# EAGLE board exp1.1 (EAGLE 9.6.2)

Size 42.85 x 30.47 mm. Coordinates in mm from the lower left corner, seen from the top.
Outline: 0,0 42.85,0 42.85,30.47 0,30.47 0,0
Copper layers (1*16): Top 0.035mm / dielectric 1.5mm / Bottom 0.035mm
Design rules "default": minimum track width 6mil, minimum drill 0.35mm, track to track 6mil, track to pad 6mil, pad to pad 6mil, via to via 6mil, smd to smd 6mil, copper to edge 40mil, drill to drill 6mil, minimum pad ring 10mil, minimum via ring 8mil, stop-mask expansion 4mil, vias tented up to drill 0mil, thermal gap 10mil

## Footprints (pad centres in the part's own frame; a part is rotated, then mirrored left to right if it is on the bottom)
C2.5-3 = drill 0.813 pad 1.6 octagon: 1 -1.27,0; 2 1.27,0
DIO_BPW41N = drill 0.83 pad 1.25: A 1.25,0 | drill 0.83 pad 1.25 square: C -1.25,0
DIL08 = drill 0.813 pad 1.27: 1 -3.81,-3.81; 2 -1.27,-3.81; 3 1.27,-3.81; 4 3.81,-3.81; 5 3.81,3.81; 6 1.27,3.81; 7 -1.27,3.81; 8 -3.81,3.81
0207/10 = drill 0.813 octagon: 1 -5.08,0; 2 5.08,0
22-23-2031 = drill 1 long: 1 -2.54,0; 2 0,0; 3 2.54,0

## Placement (x,y rotation side)
C1  [C2.5-3]  29.21,8.89 270 top
D1  BPW41N  [DIO_BPW41N]  5.08,20.32 0 top
IC1  LM311N  [DIL08]  21.59,13.97 0 top
R1  [0207/10]  11.43,21.59 270 top
R2  [0207/10]  11.43,7.62 270 top
R3  [0207/10]  6.35,7.62 90 top
R4  [0207/10]  29.21,22.86 270 top
X1  22-23-2031  [22-23-2031]  36.83,16.51 0 top

## Library data of the parts
C1 = capacitor-wima
D1 = BPW41N; AVAILABILITY: In Stock; DESCRIPTION: Photodiode 940nm 130° Radial, Side View; MF: Vishay Semiconductor Opto Division; MP: BPW41N; PACKAGE: None; PRICE: None; PURCHASE-URL: https://pricing.snapeda.com/search/part/BPW41N/?ref=eda
IC1 = linear
R1-R4 = rcl; SPICEPREFIX: R
X1 = con-molex; MF: MOLEX; MPN: 22-23-2031; OC_FARNELL: 1462950; OC_NEWARK: 30C0862

## Nets
+5V: D1.C IC1.8 R1.2 R4.2 X1.1
GND: C1.2 IC1.1 IC1.4 R2.1 R3.1 X1.3
N$1: IC1.3 R1.1 R2.2
N$3: D1.A IC1.2 R3.2
N$4: C1.1 R4.1
N$5: IC1.7 X1.2